# Altium PCB SV06.PcbDoc (part 2 of 3)
Units mil, origin at the board's own origin, x right, y up, seen from the top; angles counter-clockwise.
Board outline 3960.63 x 2763.78 mil, 2 copper layers (Top, Bottom), stack 12.7 mil thick; 211 components, 173 nets, 726 pads, 644 vias.
Unrouted connection lines stored in the file: 411.
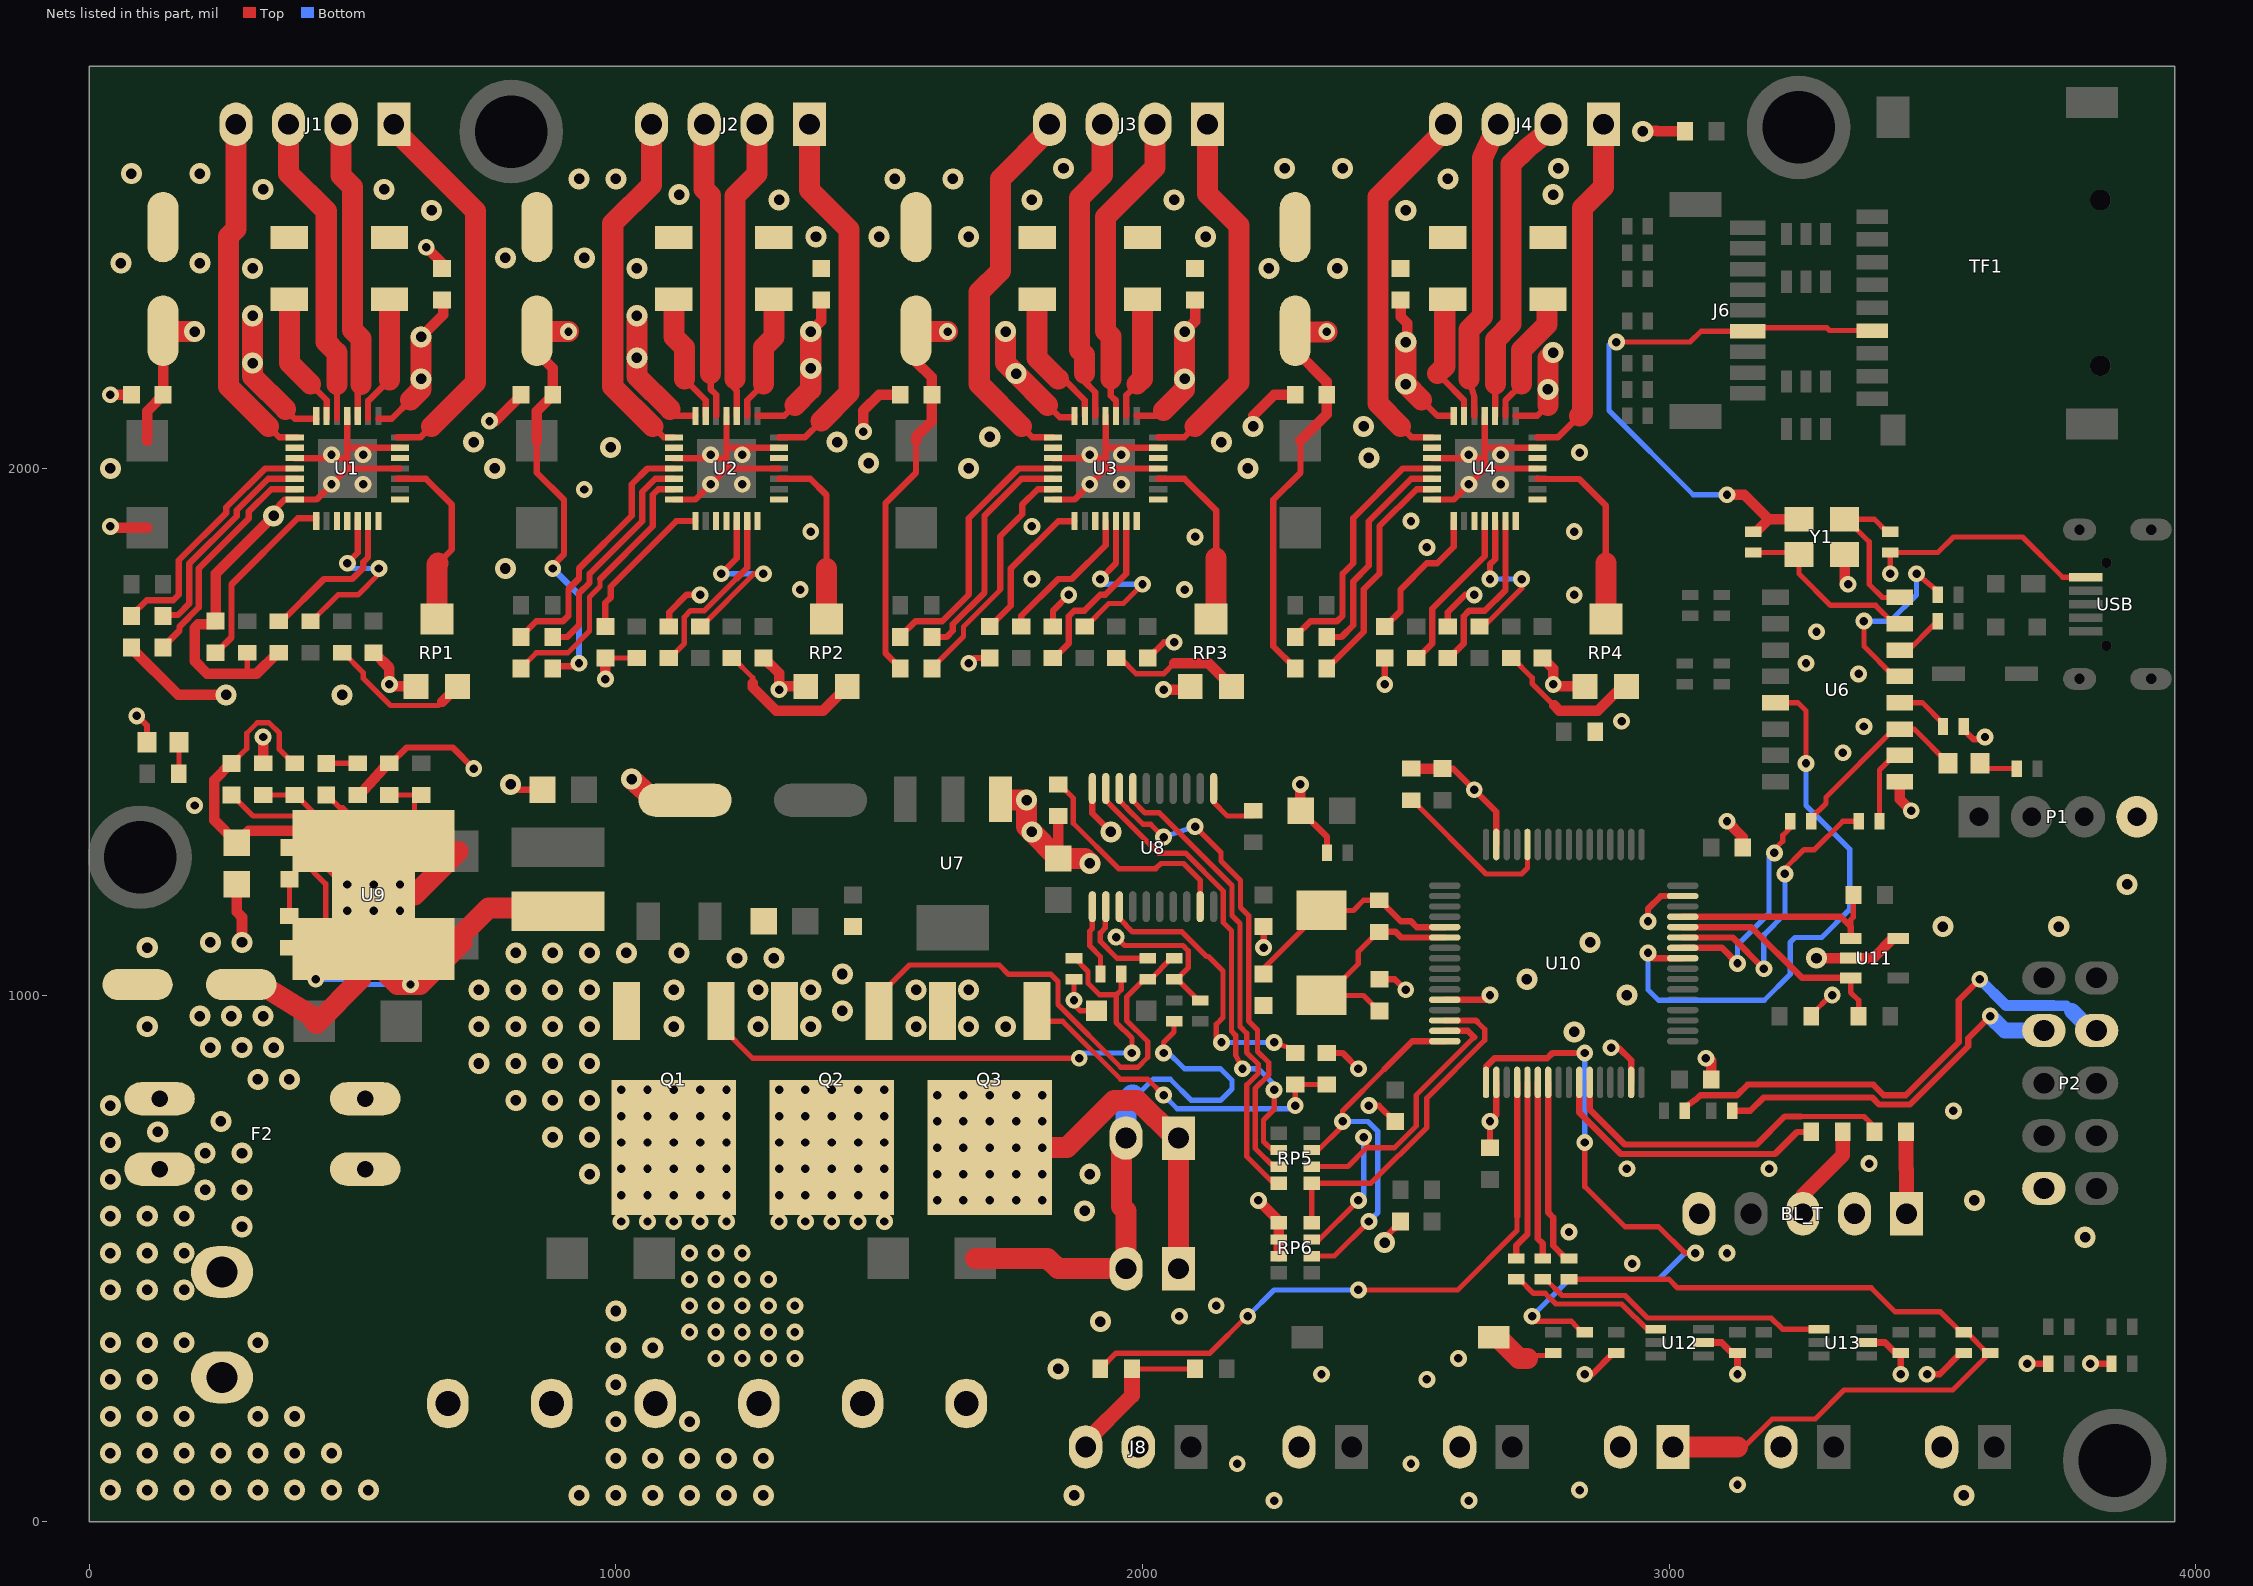
[diagram p2: the nets of this part, all layers, seen from the top]

## Via types
v1: diameter 32, hole 16, Top to Bottom, 363 vias
v2: diameter 40, hole 20, Top to Bottom, 281 vias

## Nets (pads, with @x,y where several pads share a name; then routed paths per layer and width w, separated by ;. In a path a pad name is that pad's centre, name@x,y a point inside that pad or via, vN(x,y) a via of type N, cw(c..) or ccw(c..) an arc to the next point about the centre after c; other vN are vias at no path point) (continued)
24V: C1.2 C2.2 C3.1 C4.1 C5.1 C6.1 C7.1 C8.1 C9.1 C10.1 C11.2 C12.2 C20.1 C23.1 C26.1 C29.1 C42.1 C48.1 R27.2 U1.22 U1.28 U2.22 U2.28 U3.22 U3.28 U4.22 U4.28 U9.2 | length 5495.8
  Top w12: 372.49,2112.49 390.49,2094.49 430.94,2094.49 ; 549.06,2094.49 574.49,2094.49 610,2130 ; 850,2052.68 850,1992.17 901.37,1940.8 901.37,1836.83 877.27,1812.73 v1(880,1810) ; C23.1@880,1620 880,1624.55 930,1624.55 v1(930,1630) ; 1102.49,2112.49 1115.08,2099.9 1150.94,2099.9 ; 1269.06,2099.9 1319.9,2099.9 1340,2120 ; C26.1@1540,1620 1540,1621 1512,1649 1512,1934.17 1570,1992.17 1570,2052.68 ; 1820,2120 1842.63,2097.37 1870.94,2097.37 1870.94,2099.9 ; 1989.06,2099.9 2029.9,2099.9 2040,2110 ; C29.1@2290,1620 2290,1621 2248.63,1662.37 2248.63,1940.8 2300,1992.17 2300,2052.68 ; 2530,2130 2560.1,2099.9 2590.94,2099.9 ; 2709.06,2099.9 2749.9,2099.9 2770,2120
  Top w20: C20.1@80,1660 80,1659 169,1570 v2(260,1570) ; 110,2052.68 110,2109 140,2139 C9.1@140,2140 140,2260 C5.1@140,2261.57 ; C42.1@280,1210.63 280,1157.81 290,1147.81 v2(290,1100) ; R27.2@330,1440 v1(330,1490) ; v2(630,2250) 672,2292 672,2320 C1.2@670,2320 ; 850,2052.68 850,2109 880,2139 C10.1@880,2140 ; C6.1@850,2261.57 850,2220 880,2190 C10.1@880,2140 ; C10.1@882.64,2140 C10.1@880,2140 ; v2(1370,2260) 1390,2280 C2.2@1390,2320 ; 1570,2052.68 1570,2060 1600,2090 C11.2@1600,2140 1600,2173 1570,2203 1570,2260 C7.1@1570,2261.57 ; v2(2080,2260) 2100,2280 C3.1@2100,2320 ; C8.1@2290,2261.57 2290,2260 2290,2259.41 2290,2224.17 2350,2164.17 C12.2@2350,2140 2350,2102.68 2300,2052.68 ; C4.1@2490,2320 2490.73,2320 2490.73,2288 2502.73,2276 2502.73,2240 v2(2500,2240)
  Top w40: C5.1@140,2260 v2(200,2260) ; C48.1@288.43,1020 325.83,1020 427.32,957.43 427.32,950 431.09,950 431.09,946.23 515,1030.14 U9.2@515,1087.64 ; v2(310,2290) v2(310,2200) 310,2174.98 372.49,2112.49 ; 610,2130 630,2150 v2(630,2170) v2(630,2250) ; C6.1@850,2261.57 852.72,2260 v1(910,2260) ; v2(1040,2290) v2(1040,2210) 1040,2174.98 1102.49,2112.49 ; 1340,2120 1370,2150 v2(1370,2190) v2(1370,2260) ; C7.1@1570,2260 v1(1630,2260) ; v2(1740,2260) 1740,2200 v2(1760,2180) 1820,2120 ; 2040,2110 2080,2150 v2(2080,2170) v2(2080,2260) ; C8.1@2290,2259.41 2350,2259.41 v1(2350,2260) ; v2(2500,2240) v2(2500,2160) 2530,2130 ; 2770,2120 v2(2770,2150) 2770,2210 v2(2780,2220)
  Bottom w12: v1(880,1810) 930,1760 v1(930,1630)
  other v2: 320,840 380,840 230,900 290,900 350,900 210,960 270,960 330,960 230,1100
24V_IN: BED.1 F2.3 F2.4 FAN.1 HEAT1.1 J5.2 J7.2 R67.2 | length 1109.1
  Top w10: v1(2040,890) 2040,910 2060,930 R67.2@2060,950.32
  Top w40: 1682.68,500 1819.69,500 1839.37,480.31 J7.2@1968.5,480.31 1968.5,589.88 1960,598.38 1960,728.35 J5.2@1968.5,728.35
  Bottom w10: 1981.82,810 1990,810 2020,840 2052.78,840 2092.78,800 2148.18,800 2170,821.82 2170,838.18 2148.18,860 2080,860 2045,895 v1(2040,890)
  Bottom w40: J5.2@1968.5,728.35 1968.5,798.5 1980,810 1981.82,810
  other v2: 930,50 1000,50 1070,50 1140,50 1210,50 1280,50 1000,120 1070,120 1140,120 1210,120 1280,120 1000,190 1140,190 1000,260 1000,330 1070,330 1000,400
$$$280: D6.2 R26.1 | length 60.3
  Top w10: R26.1@170,1420 170.32,1420 D6.2@170.32,1480
$$$2564: R15.1 U2.12 | length 358
  Top w10: R15.1@1160,1700 1162.5,1700 1262.5,1800 v1(1280,1800)
  Top w12: v1(1200,1800) 1229.68,1829.68 1229.68,1900.1
  Bottom w10: v1(1200,1800) 1205,1805 1210,1800 v1(1280,1800)
$$$2565: R14.1 U2.13 | length 338.8
  Top w10: R14.1@1100,1640 1102.5,1640 1130,1667.5 1130,1718.06 1141.94,1730 1168.18,1730 1228.18,1790
  Top w12: 1228.18,1790 1249.37,1811.19 1249.37,1900.1
$$$2566: R16.1 RP2.3 | length 290.3
  Top w10: R16.1@1220,1640 1222.5,1640 1260,1602.5 1260,1591.82
  Top w20: 1260,1591.82 1260,1584.75 1304.75,1540 1393.34,1540 RP2.3@1439.37,1586.03
$$$2567: RP2.2 U2.17 | length 338.4
  Top w12: 1309.9,1980.31 1369.28,1980.31 1400,1949.6 1400,1810
  Top w40: RP2.2@1400,1713.98 1400,1810
$$$2568: C17.1 U2.4 | length 499.1
  Top w12: C17.1@820,1680 820,1681 849,1710 899.47,1710 910,1720.53 910,1771.12 930,1791.12 930,1810 1030,1910 1030,1970 1060,2000 1110.1,2000
$$$2569: C17.2 U2.5 | length 432.7
  Top w12: C17.2@880,1680 908,1680 930,1702 930,1762.8 950,1782.8 950,1800 1050,1900 1050,1955.46 1074.86,1980.31 1110.1,1980.31
$$$2570: C23.2 U2.6 | length 513.2
  Top w10: C23.2@820,1620 820,1621 849,1650 909,1650 950,1691 950,1755.9 970,1775.9 970,1790
  Top w12: 970,1790 1070,1890 1070,1950 1080.63,1960.63 1110.1,1960.63
$$$2571: S4.2 U2.23 | length 242.4
  Top w12: 1249.37,2099.9 1249.37,2129.37 1280,2160
  Top w40: 1280,2160 1280,2229.55 1300,2249.55 S4.2@1300,2321.34
$$$2572: S3.2 U2.27 | length 246.6
  Top w12: 1130,2170 1170.63,2129.37 1170.63,2099.9
  Top w40: S3.2@1110,2321.34 1110,2250 1130,2230 1130,2170
$$$2573: C24.1 U2.8 | length 296.8
  Top w10: C24.1@980,1700 C24.1@984.62,1700
  Top w12: C24.1@980,1700 980,1744.93 990,1754.93 990,1775.46 1114.64,1900.1 1150.94,1900.1
$$$2574: J2.1 U2.21 | length 709.6
  Top w12: 1309.9,2059.06 1359.06,2059.06 1390,2090
  Top w40: J2.1@1367.72,2653.54 1367.72,2529.13 1443,2453.85 1443,2143 1390,2090
$$$2575: J2.2 U2.24 | length 572.4
  Top w12: 1226,2170 1226,2151.41 1229.68,2147.72 1229.68,2099.9
  Top w40: 1226,2170 1226,2517.77 1267.72,2559.49 J2.2@1267.72,2653.54
$$$2576: J2.3 U2.26 | length 563
  Top w12: 1180,2180 1180,2150 1190.32,2139.68 1190.32,2099.9
  Top w40: J2.3@1167.72,2653.54 1167.72,2530.8 1180,2518.51 1180,2180
$$$2577: J2.4 U2.1 | length 684.4
  Top w12: 1070,2079.93 1090.87,2059.06 1110.1,2059.06
  Top w40: J2.4@1067.72,2653.54 1067.72,2538.51 994,2464.8 994,2155.93 1070,2079.93
$$$5473: HEAT1.2 Q2.2
  other v1: 1310,570 1360,570 1410,570 1460,570 1510,570 1310,620 1360,620 1410,620 1460,620 1510,620 1310,670 1360,670 1410,670 1460,670 1510,670 1310,720 1360,720 1410,720 1460,720 1510,720 1310,770 1360,770 1410,770 1460,770 1510,770 1310,820 1360,820 1410,820 1460,820 1510,820
$$$5502: J5.1 J7.1 Q3.2 | length 674.4
  Top w40: Q3.2@1710,710.4 1856.75,710.4 1946.36,800 1990.55,800 2060.43,730.12 2060.43,728.35 J5.1@2068.5,728.35 J7.1@2068.5,480.31
  other v1: 1610,610 1660,610 1710,610 1760,610 1810,610 1610,660 1660,660 1710,660 1760,660 1810,660 1610,710 1660,710 1710,710 1760,710 1810,710 1610,760 1660,760 1710,760 1760,760 1810,760 1610,810 1660,810 1710,810 1760,810 1810,810
$$$5770: R19.1 U3.12 | length 355.6
  Top w10: R19.1@1890,1700 1892.5,1700 1935.95,1743.45 1963.45,1743.45 v1@1999.06,1779.06 ; v1@1999.06,1779.06 v1(2000,1780) 1999.06,1776.56 v1@1999.06,1779.06
  Top w12: v1(1920,1790) 1949.68,1820.31 1949.68,1900.1
  Bottom w10: v1(1920,1790) 1930,1780 v1(2000,1780)
$$$5771: R18.1 U3.13 | length 336.3
  Top w12: R18.1@1830,1640 1832.5,1640 1860,1667.5 1860,1719.47 1870.53,1730 1889.79,1730 1919.79,1760 1929.6,1760 1969.37,1799.77 1969.37,1900.1
$$$5772: R20.1 RP3.3 | length 262.2
  Top w10: R20.1@1950,1640 1950,1642.78 1955.28,1642.78 1988.06,1610 2040.18,1610 2060.18,1630
  Top w20: 2060.18,1630 2125.39,1630 RP3.3@2169.37,1586.03
$$$5773: RP3.2 U3.17 | length 350.9
  Top w12: 2029.9,1980.31 2079.68,1980.31 2139.85,1920.15 2139.85,1829.85
  Top w40: RP3.2@2130,1713.98 2139.85,1713.98 2139.85,1829.85
$$$5774: C18.1 U3.4 | length 508.1
  Top w12: C18.1@1540,1680 1540,1681 1569,1710 1619.47,1710 1670,1760.53 1670,1905.46 1764.54,2000 1830.1,2000
$$$5775: C18.2 U3.5 | length 447
  Top w12: C18.2@1600,1680 1628,1680 1640,1692 1640,1704.3 1700,1764.3 1700,1910 1770.32,1980.31 1830.1,1980.31
$$$5776: C26.2 U3.6 | length 453.1
  Top w10: C26.2@1600,1620 1600,1621 1660,1681 1660,1699.48 1730,1769.48 1730,1771.1
  Top w12: 1730,1771.1 1730,1870.95 1771.8,1912.75 1771.8,1931.56 1800.87,1960.63 1830.1,1960.63
$$$5777: S6.2 U3.23 | length 234.1
  Top w12: 1969.37,2099.9 1969.37,2139.37 1990,2160
  Top w40: 1990,2160 2000,2170 S6.2@2000,2321.34
$$$5778: S5.2 U3.27 | length 264.8
  Top w12: 1840,2170 1850,2170 1890.63,2129.37 1890.63,2099.9
  Top w40: S5.2@1800,2321.34 1800,2210 1840,2170
$$$5779: C27.1 U3.8 | length 285.5
  Top w12: C27.1@1710,1700 1711,1700 1750,1739 1750,1810 1840,1900 1870.94,1900 1870.94,1900.1
$$$5780: J3.1 U3.21 | length 711.3
  Top w12: 2029.9,2059.06 2079.06,2059.06 2100,2080
  Top w40: 2100,2080 2183,2163 2183,2461.8 2123.62,2521.18 J3.1@2123.62,2653.54
$$$5781: J3.2 U3.24 | length 601.1
  Top w12: 1940,2170 1940,2138 1948,2130 1948.81,2130 1949.68,2129.13 1949.68,2099.9
  Top w40: 1940,2170 1940,2250.97 1930,2260.97 1930,2477.85 2023.62,2571.47 J3.2@2023.62,2653.54
$$$5782: J3.3 U3.26 | length 584.3
  Top w12: 1890,2180 1890,2165.1 1910.32,2144.79 1910.32,2099.9
  Top w40: 1890,2180 1890,2215.49 1880,2225.49 1880,2513.92 1923.62,2557.54 J3.3@1923.62,2653.54
$$$5783: J3.4 U3.1 | length 730.8
  Top w12: 1770,2080 1790.94,2059.06 1830.1,2059.06
  Top w40: 1770,2080 1690,2160 1690,2335 1730,2375 1730,2550.08 1823.62,2643.7 J3.4@1823.62,2653.54
$$$7411: R23.1 U4.12 | length 305.9
  Top w10: R23.1@2640,1700 2640,1697.22 2645.28,1697.22 2720,1771.94 v1(2720,1790)
  Top w12: v1(2660,1790) 2660,1818.08 2669.68,1827.76 2669.68,1900.1
  Bottom w10: v1(2660,1790) v1(2720,1790)
$$$7412: R22.1 U4.13 | length 324.4
  Top w12: R22.1@2580,1640 2582.5,1640 2610,1667.5 2610,1719.47 2620.03,1729.5 2650,1729.5 2689.37,1768.87 2689.37,1900.1
$$$7413: R24.1 RP4.3 | length 292.4
  Top w10: R24.1@2700,1640 2702.5,1640 2740,1602.5 2740,1591.82 2781.82,1550
  Top w20: 2781.82,1550 2791.82,1540 2864.48,1540 2914.94,1590.46 2919.37,1590.46 RP4.3@2919.37,1586.03
$$$7414: RP4.2 U4.17 | length 367
  Top w12: 2749.9,1980.31 2749.9,1980.1 ; 2880,1820 2880,1929.6 2829.6,1980 2750,1980 ; 2749.9,1980.1 2750,1980 ; 2749.9,1980.1 2749.9,1980 2750,1980
  Top w40: RP4.2@2880,1713.98 2880,1820
$$$7415: C19.1 U4.4 | length 490
  Top w12: C19.1@2290,1680 2290,1681 2319,1710 2369.47,1710 2380,1720.53 2380,1800.34 2400,1820.34 2400,1905.77 2494.23,2000 2550.1,2000
$$$7416: C19.2 U4.5 | length 422.9
  Top w12: C19.2@2350,1680 2378,1680 2400,1702 2400,1785.34 2430,1815.34 2430,1900 2510.32,1980.31 2550.1,1980.31
$$$7417: C29.2 U4.6 | length 440.8
  Top w12: C29.2@2350,1620 2420,1690 2420,1770.34 2450,1800.34 2450,1890 2520.63,1960.63 2550.1,1960.63
$$$7418: S8.2 U4.23 | length 256
  Top w12: 2689.37,2099.9 2689.37,2129.37 2720,2160
  Top w40: 2720,2160 2720,2225.05 2768.04,2273.09 2768.04,2321.34 S8.2@2770,2321.34
$$$7419: S7.2 U4.27 | length 255.4
  Top w12: 2560,2180 2560,2178 2568,2170 2570,2170 2610.63,2129.37 2610.63,2099.9
  Top w40: 2560,2180 2574,2194 2574,2321.34 S7.2@2580,2321.34
$$$7420: C30.1 U4.8 | length 266.4
  Top w12: C30.1@2460,1700 2461,1700 2490,1729 2490,1770 2540,1820 2559.6,1820 2590.94,1851.35 2590.94,1900.1
$$$7421: J4.1 U4.21 | length 669.5
  Top w12: 2749.9,2059.06 2789.06,2059.06 2830,2100
  Top w40: 2830,2100 2836,2106 2836,2494.57 2875.59,2534.16 J4.1@2875.59,2653.54
$$$7422: J4.2 U4.24 | length 601
  Top w12: 2669.68,2099.9 2670,2099.9 2670,2160
  Top w40: 2670,2160 2670,2244.24 2700,2274.24 2700,2577.95 2730.01,2607.97 2775.59,2643.7 J4.2@2775.59,2653.54
$$$7423: J4.3 U4.26 | length 575.7
  Top w12: 2620,2170 2630.32,2135.06 2630.32,2099.9
  Top w40: 2620,2170 2620,2263.43 2645.6,2289.03 2645.6,2590 2671.19,2645.72 2671.19,2653.54 J4.3@2675.59,2653.54
$$$7424: J4.4 U4.1 | length 713.4
  Top w12: 2490,2080 2510.94,2059.06 2550.1,2059.06
  Top w40: 2490,2080 2447,2123 2447,2515.11 2575.59,2643.7 J4.4@2575.59,2653.54
$$$7564: J8.3 R58.2 R59.1 | length 304.7
  Top w10: R58.2@1980,290 R59.1@2100,290
  Top w30: J8.3@1892.13,141.73 1892.13,151.57 1980,239.45 R58.2@1980,290
$$$8275: R63.1 S9.2 | length 136.5
  Top w10: 2731.07,310 2736.53,315.47 2780,315.47 R63.1@2780,320.31
  Top w40: S9.2@2667.16,350 2675.03,350 2715.07,309.96 2729.96,309.96 2730,310 2731.07,310
$$$11500: BL_T.1 R48.2 | length 155.7
  Top w28: R48.2@3450,740 3450,670 3450.79,669.21 BL_T.1@3450.79,584.65
$$$11539: BL_T.3 R47.2 | length 186.9
  Top w28: BL_T.3@3253.94,584.65 3253.94,620 3330,696.06 R47.2@3330,740
$$$12002: C43.1 U9.1 | length 228.1
  Top w10: C43.1@380,1280 381.83,1280 404.28,1255.72 448.87,1211.13 448.87,1123.45 465,1107.32 U9.1@465,1087.64
$$$12005: C43.2 R38.1 | length 70
  Top w10: R38.1@380,1150 C43.2@380,1220
$$$12017: J1.1 U1.21 | length 746.2
  Top w12: 584.49,2059.06 629.06,2059.06 650,2080
  Top w40: J1.1@578.35,2653.54 578.35,2643.7 733,2489.05 733,2163 650,2080
$$$12018: L1.1 R38.2 U9.3 | length 733.5
  Top w10: R38.2@380,1090 382.5,1090 410.91,1061.59 410.91,1049.09 v1(430,1030)
  Top w40: U9.3@565,1087.64 565,1040 585,1020 v1(610,1020) 628.19,1020 707.75,1099.57 700,1099.57 700,1107.32 757.75,1165.08 890,1165.08 L1.1@890,1158.98
  Bottom w10: v1(430,1030) 515,1030 525,1020 v1(610,1020)
$$$12023: J1.2 U1.24 | length 577.5
  Top w12: 509.68,2094.49 509.68,2153.06 516.32,2159.68
  Top w40: J1.2@478.35,2653.54 478.35,2556.37 500,2534.72 500,2262.97 516.32,2246.66 516.32,2159.68
$$$12028: J1.3 U1.26 | length 597.1
  Top w12: 470.32,2094.49 470.32,2159.68
  Top w40: J1.3@378.35,2653.54 378.35,2560.48 450,2488.83 450,2240 470.32,2219.68 470.32,2159.68
$$$12035: J1.4 U1.1 | length 675.2
  Top w12: 340,2079.93 360.87,2059.06 395.51,2059.06
  Top w40: J1.4@278.35,2653.54 278.35,2454.8 264,2440.46 264,2155.93 340,2079.93
$$$12073: R30.2 R31.1 U9.5 | length 150.1
  Top w10: R30.2@570,1380 R31.1@617.5,1380 ; U9.5@615,1292.36 617.5,1292.36 R31.1@617.5,1380 ; R31.1@630,1380 R31.1@617.5,1380
$$$12171: R27.1 R28.2 U9.7 | length 231.6
  Top w10: R27.1@330,1380 R28.2@390,1380 392.5,1380 432.5,1340 470,1340 500,1310 515,1310 U9.7@515,1292.36
$$$12210: C32.1 U9.8 | length 242.5
  Top w10: C32.1@270,1380 271,1380 311,1340 406.25,1340 434.81,1311.44 465,1311.44 U9.8@465,1292.36
$$$12278: C33.1 U9.6 | length 162.8
  Top w10: C33.1@450,1380 451,1380 474.89,1356.11 481.17,1356.11 497.29,1340 537.05,1340 565,1312.05 U9.6@565,1292.36
$$$12281: C33.2 R29.2 | length 60
  Top w10: C33.2@450,1440 R29.2@510,1440
$$$15799: R33.1 U10.60 | length 328.5
  Top w10: R33.1@2510,1370 2512.5,1370 2652.5,1230 2720,1230 2731.1,1241.1 U10.60@2731.1,1285.91
$$$17590: R66.1 U3.11 | length 281.5
  Top w12: R66.1@1770,1700 1770,1720 1840,1790 1865.77,1790 1930,1854.23 1930,1900.1
$$$18645: R11.1 U1.12 | length 335.7
  Top w10: R11.1@420,1710 422.5,1710 472.5,1760 510,1760 549.06,1799.06 549.06,1810 v1(550,1810)
  Top w12: v1(490,1820) 489.89,1820.11 509.68,1839.91 509.68,1905.51
  Bottom w10: v1(490,1820) 500,1810 v1(550,1810)
$$$18657: R10.1 U1.13 | length 300.6
  Top w12: R10.1@360,1710 365.62,1710 445.62,1790 499.6,1790 520.06,1810.46 520.06,1822.22 529.37,1831.54 529.37,1905.51
$$$19214: Q2.1 R42.1 R43.2 | length 929.5
  Top w10: Q2.1@1499.48,969.6 1499.48,999.13 1557.35,1057 1728,1057 1745.64,1039.36 1825.99,1039.36 1839.66,1025.69 1839.66,982.15 1958.82,863 1991.18,863 2010,881.82 2010,911.56 1970,951.56 1970,996.23 2004.09,1030.32 R43.2@2010,1030.32 2016.1,1030.32 2053.9,1069.69 R42.1@2060,1069.69
$$$19611: RP5.8 U8.7 | length 908.6
  Top w10: U8.7@1981.61,1392.2 1981.61,1369.57 2005.13,1346.05 2032.13,1346.05 2169.84,1208.35 2169.84,1151.25 2185.26,1135.82 2185.26,940.05 2197.81,927.5 2197.81,890.7 2220,868.51 2220,851.49 2198,829.49 2198,693.61 2252.2,639.41 2258.5,639.41 RP5.8@2258.5,642.76
$$$19787: Q3.1 R45.2 R46.1 | length 689
  Top w10: Q3.1@1799.48,969.6 1799.48,950 1848.69,950 1958.69,840 2010,840 v1(2040,810) ; v1(2290,790) 2285,795 2290,800 R45.2@2290,830 R46.1@2350,830
  Bottom w10: v1(2040,810) 2066,784 2290,784 v1(2290,790)
$$$20193: RP5.7 U8.8 | length 939.9
  Top w10: U8.8@1956.02,1392.2 1956.02,1369.57 1970,1355.59 1970,1355.54 2001.11,1324.43 2015.57,1324.43 v1(2040,1300) ; v1(2100,1320) 2149.05,1270.95 2149.05,1254.44 2186.23,1217.25 2186.23,1166.54 2201.59,1151.18 2201.59,950.85 2218.62,933.82 2218.62,892.85 2240,871.47 2240,848.53 2214,822.53 2214,709.11 2250.73,672.38 2258.5,672.38 RP5.7@2258.5,674.25
  Bottom w10: v1(2040,1300) v1(2100,1320)
$$$20195: RP5.6 U8.9 | length 896.3
  Top w10: U8.9@1930.43,1392.2 1930.43,1369.57 2030.5,1269.5 2081.39,1269.5 2153.44,1197.45 2153.44,1137.71 2169.01,1122.14 2169.01,931.43 2177,923.43 2177,885.18 v1(2190,860) ; v1(2250,820) 2250,782.92 2230,762.92 2230,721.61 2249.23,702.38 2258.5,702.38 RP5.6@2258.5,705.75
  Bottom w10: v1(2190,860) 2220,860 2250,830 v1(2250,820)
$$$20338: R36.2 U8.1 | length 122.5
  Top w10: U8.1@2135.16,1392.2 2134.73,1392.2 2134.73,1366.32 2161.06,1340 2210,1340 R36.2@2210,1350
$$$20351: R32.1 U8.19 | length 431.8
  Top w10: R32.1@1840,1400 1842.5,1400 1868.5,1374 1868.5,1326.28 1954.78,1240 2025,1240 2035,1250 2078.18,1250 2109.57,1218.62 U8.19@2109.57,1167.8
$$$20356: R21.1 U4.11 | length 315.4
  Top w12: R21.1@2520,1640 2522.5,1640 2550,1667.5 2550,1733.61 2650,1833.61 2650,1900.1
$$$23378: R13.1 U12.4 | length 307.7
  Top w10: R13.1@2710,460.31 2715.91,460.31 2742.68,433.54 2764.93,433.54 2784.96,413.51 2910.03,413.51 2960.62,362.91 2974.72,362.91 U12.4@2974.72,365.59
$$$24620: D5.2 R25.1 | length 80
  Top w10: D5.2@3590.32,1440 3590.32,1430 R25.1@3660.31,1430
$$$24621: D5.1 R34.1 U6.3 | length 370.2
  Top w10: R34.1@3269.69,1330 3269.69,1335.91 3297.84,1364.06 3297.84,1375.56 3427.28,1505 U6.3@3438.11,1505 3465.67,1505 3529.69,1440.98 D5.1@3529.69,1440
$$$24623: C14.1 U6.7 Y1.1 | length 357.8
  Top w10: C14.1@3160,1840.31 3246.69,1840.31 Y1.1@3246.69,1836.53 3246.69,1800 3306.69,1740 3392.28,1740 3427.28,1705 U6.7@3438.11,1705
$$$24624: C13.2 U6.8 Y1.3 | length 306.2
  Top w10: Y1.3@3333.31,1903.47 Y1.3@3337.25,1903.47 ; C13.2@3420,1879.68 3414.1,1879.68 3390.32,1903.47 Y1.3@3337.25,1903.47 ; U6.8@3438.11,1755 3405,1755 3380,1780 3380,1860.71 Y1.3@3337.25,1903.47
$$$24628: C15.1 U6.4 | length 104.3
  Top w10: U6.4@3438.11,1555 3481.22,1555 3520.31,1515.9 C15.1@3520.31,1510
$$$24629: R35.1 U6.2 | length 147.3
  Top w10: R35.1@3399.69,1330 3399.69,1427.41 3427.28,1455 U6.2@3438.11,1455
$$$24673: C57.2 J11.1 R54.1 R64.2 | length 1537.5
  Top w10: R64.2@2810,460.32 3000,460.32 3016.36,443.96 3383.87,443.96 3429.49,398.34 3515.44,398.34 3554.1,359.68 C57.2@3560,359.68 ; 3130,141.73 3142.66,141.73 3195.98,195.05 3277.53,195.05 3332.48,250 3538.75,250 R54.1@3609.06,320.31 ; C57.2@3560,363.21 C57.2@3560,359.68 ; R54.1@3610,320.31 R54.1@3609.06,320.31 ; C57.2@3560,359.68 3566.1,359.68 3603.9,320.31 R54.1@3609.06,320.31
  Top w40: J11.1@3007.48,141.73 3130,141.73
$$$24916: F2.1 F2.2 P3.2
  other v2: 40,440 110,440 180,440 40,510 110,510 180,510 290,560 40,580 110,580 180,580 220,630 290,630 40,650 220,700 290,700 40,720 130,740 250,760 40,790
$$$24933: R51.1 U13.4 | length 564
  Top w10: R51.1@2760,460.31 2765.91,460.31 2796.71,429.51 2916.65,429.51 2959.23,386.93 3193.9,386.93 3215.24,365.59 U13.4@3284.72,365.59
$$$26347: R12.1 RP1.3 | length 282
  Top w10: R12.1@480,1650 482.5,1650 520,1612.5 520,1601.82 571.82,1550 663.34,1550 670,1556.66
  Top w20: 670,1556.66 RP1.3@699.37,1586.03
$$$26355: RP1.2 U1.17 | length 352.9
  Top w12: 584.49,1980.31 639.28,1980.31 688,1931.6 688,1845.96 662.04,1820
  Top w40: RP1.2@660,1713.98 660,1817.95 662.04,1820
$$$26401: C16.1 U1.4 | length 476.4
  Top w12: C16.1@80,1720 80,1721 109,1750 159.47,1750 170,1760.53 170,1825.41 260,1915.41 260,1926.17 333.83,2000 395.51,2000
$$$26406: C16.2 U1.5 | length 415.3
  Top w12: C16.2@140,1720 140,1721.57 168,1721.57 190,1743.57 190,1819.46 280,1909.46 280,1920.71 339.6,1980.31 395.51,1980.31
$$$26553: C20.2 U1.6 | length 435.8
  Top w12: C20.2@140,1660 140,1661 171.24,1692.24 171.24,1699.36 208,1736.11 208,1810 303,1905 303,1918.25 345.38,1960.63 395.51,1960.63
$$$26660: S2.2 U1.23 | length 244.6
  Top w12: 529.37,2094.49 529.37,2129.13 531.01,2129.13 570,2168.12
  Top w40: 570,2168.12 S2.2@570,2321.34
$$$26663: S1.2 U1.27 | length 256.1
  Top w12: 420,2160 450.63,2129.37 450.63,2094.49
  Top w40: S1.2@380,2321.34 380,2200 420,2160
$$$26686: C21.1 U1.8 | length 355.7
  Top w12: C21.1@240,1650 241,1650 270,1679 270,1779.6 395.91,1905.51 430.94,1905.51
$$$32108: P2.3 R17.2 | length 698
  Top w12: R17.2@3119.68,780 3154.09,780 3179.59,805.5 3385.67,805.5 3399.17,792 3457.05,792 3568,902.95 3568,918 v1(3610,960)
  Bottom w30: v1(3610,960) 3637.32,932.68 P2.3@3711.81,932.68
$$$32145: P2.4 R65.1 | length 991.8
  Top w12: R65.1@3029.69,780 3029.69,787.09 3052.72,803.03 3059.69,810 3129.1,810 3149.1,830 3387.61,830 3407.61,810 3449.6,810 3550,910.4 3550,990 v1(3590,1030)
  Bottom w20: v1(3590,1030) 3639.83,980.17 3730,980.17 3730,980 3754.65,980 3764.65,970
  Bottom w30: 3764.65,970 3801.97,932.68 P2.4@3811.81,932.68
$$$32443: BED.2 Q1.2
  other v1: 1190,310 1240,310 1290,310 1340,310 1140,360 1190,360 1240,360 1290,360 1340,360 1140,410 1190,410 1240,410 1290,410 1340,410 1140,460 1190,460 1240,460 1290,460 1140,510 1190,510 1240,510 1010,570 1060,570 1110,570 1160,570 1210,570 1010,620 1060,620 1110,620 1160,620 1210,620 1010,670 1060,670 1110,670 1160,670 1210,670 1010,720 1060,720 1110,720 1160,720 1210,720 1010,770 1060,770 1110,770 1160,770 1210,770 1010,820 1060,820 1110,820 1160,820 1210,820
$$$32478: Q1.1 R40.1 R41.2 | length 1163.3
  Top w10: Q1.1@1199.48,999.48 Q1.1@1199.48,969.6 1199.48,940.07 1259.55,880 v1(1880,880) ; R40.1@1870,1069.69 1870.31,1070 1871.47,1070 1896.75,1044.72 1896.75,1022.42 1918.48,1000.68 1949.63,1000.68 1950,1000.32 ; R41.2@1959.68,1040 1959.68,1010 1950,1000.32 ; v1(1980,890) 1980,918.18 1950,948.18 1950,1000.32
  Bottom w10: v1(1880,880) 1880,890 v1(1980,890)
BED_5V: R41.1 U8.11 | length 138.2
  Top w10: U8.11@1904.84,1167.8 1904.84,1126.41 1900,1121.57 1900,1093.12 1920.31,1072.81 R41.1@1920.31,1040
D+: R71.2 U6.5 | length 359.3
  Top w10: v1(3370,1710) 3370,1662.28 3427.28,1605 U6.5@3438.11,1605 ; v1(3470,1800) 3510.32,1766.76 R71.2@3510.32,1760
  Bottom w10: v1(3370,1710) 3420,1710 3470,1760 v1(3470,1800)
D-: R72.2 U6.6 | length 101
  Top w10: U6.6@3438.11,1655 3438.11,1651.93 3452.01,1651.93 3507.25,1707.17 3507.25,1710 R72.2@3510.32,1710
GND: BL_T.2 BL_T.5 C1.1 C2.1 C3.2 C4.2 C5.2 C6.2 C7.2 C8.2 C9.2 C10.2 C11.1 C12.1 C13.1 C14.2 C15.2 C21.2 C22.2 C24.2 C25.2 C27.2 C28.2 C30.2 C31.2 C32.2 C34.2 C36.1 C38.2 C39.1 C40.1 C41.1 C42.2 C44.2 C46.2 C47.2 C48.2 C49.2 C50.2 C51.1 C52.1 C53.1 C54.1 C55.1 C56.1 C57.1 C58.2 C59.2 C60.2 D6.1 D14.2 FAN.2 J6.6 J8.2 J9.2 J10.2 J11.2 P1.4 P2.9 P3.1 Q1.3 Q2.3 Q3.3 R9.1 R10.2 R14.2 R18.2 R22.2 R28.1 R29.1 R30.1 R32.2 R33.2 R40.2 R42.2 R46.2 R53.2 R55.2 R60.2 R61.2 R68.1 R70.2 RP1.1 RP2.1 RP3.1 RP4.1 RP6.1 RP6.2 RP6.3 S1.1 S2.1 S3.1 S4.1 S5.1 S6.1 S7.1 S8.1 TB.2 TF1.6 TH.2 U1.3 U1.7 U1.18 U1.20 U1.25 U2.3 U2.7 U2.18 U2.20 U2.25 U3.3 U3.7 U3.18 U3.20 U3.25 U4.3 U4.7 U4.18 U4.20 U4.25 U6.1 U7.1 U8.10 U9.0 U9.4 U10.12 U10.18 U10.31 U10.47 U10.63 U11.2 U11.5 U12.2 U13.2 USB.1 Y1.2 Y1.4 | length 10524.1
  Top w10: C32.2@270,1440 271,1440 298.89,1467.89 298.89,1497.07 318.82,1517 341.18,1517 360.86,1497.32 360.86,1466.64 387.5,1440 R28.1@390,1440 ; 300,1610 R53.2@300,1650 ; C24.2@980,1640 R55.2@1040,1640 ; R40.2@1870,1030.32 v1(1870,990) 1870,982.07 1882.07,970 1910,970 D14.2@1912.76,970 ; v1(1950,1110) 1965.89,1094.11 2076.73,1094.11 2086.75,1084.09 2086.75,1051.16 R42.2@2065.91,1030.32 ; R42.2@2060,1030.32 R42.2@2065.91,1030.32 ; R68.1@2110,989.69 2106.54,989.69 R42.2@2065.91,1030.32 ; v1(2900,2240) 3040,2240 3060.63,2260.63 3158.07,2260.63 J6.6@3149.51,2260.64 3138.9,2261.81 3143.62,2266.53 3144.09,2267 3299.79,2267 3304.98,2261.81 TF1.6@3385.83,2261.81 ; v2@2949.95,2641.2 2950,2641.15 v2(2950,2640) ; R61.2@3270,960 3270,962.5 3307.5,1000 v1(3310,1000) ; v1(3420,1800) v1@3420,1809.73 ; v1@3420,1809.74 C13.1@3420,1840.31 3510.31,1840.31 3540,1870 3671.02,1870 3747.72,1793.31 USB.1@3791.34,1793.31
  Top w12: v1(90,1530) 90.98,1530 109.69,1511.29 D6.1@109.69,1480 ; v2(350,1910) 350,1920 371.03,1941.03 395.51,1941.03 395.51,1940.94 ; 390.1,1940.94 395.51,1940.94 ; 390.1,2019.68 490,2019.68 ; v1@460,1974 v1@461.6,1972.4 ; U1.18@490,2099.9 490,2039.37 ; R30.1@570,1440 572.5,1440 602.5,1470 690,1470 v1(730,1430) ; 589.9,2000 490,2000 ; 589.9,2039.37 490,2039.37 ; v2(800,1400) 810,1390 C46.2@860.63,1390 ; R14.2@1100,1700 1101.04,1700 1101.04,1727 1134.04,1760 v1(1160,1760) ; 1110.1,1940.94 1150.94,1940.94 v1(1180,1970) 1210,2000 ; 1110.1,2019.68 1210,2019.68 ; U2.18@1210,2099.9 1210,2039.37 ; 1309.9,2000 1210,2000 ; 1309.9,2039.37 1210,2039.37 ; v1(1670,1630) 1680,1640 C27.2@1710,1640 ; R18.2@1830,1700 1830,1730 v1(1860,1760) ; 1830.1,1940.94 1870.94,1940.94 v1(1900,1970) 1930,2000 ; 1830.1,2019.68 1930,2019.68 ; U8.10@1904.84,1392.2 1904.84,1345.16 v2(1940,1310) ; U3.18@1930,2099.9 1930,2039.37 ; C28.2@2010,1640 2011,1640 2041,1670 v1(2060,1670) ; 2029.9,2000 1930,2000 ; 2029.9,2039.37 1930,2039.37 ; v1(2230,1090) C47.2@2230,1130 ; C40.1@2300.63,1350 2350.32,1300.31 C34.2@2350.32,1270 ; R46.2@2350,890 2380,890 v1(2410,860) ; v1(2430,790) 2449,790 2479,760 C52.1@2480,760 ; C50.2@2450,1030 2479,1030 2500,1009 v1(2500,1010) ; v2(2460,530) 2460,539 2490,569 C54.1@2490,570 ; v1(2460,1590) C30.2@2460,1640 ; 2550.1,1940.94 2590.94,1940.94 v1(2620,1970) 2650,2000 ; 2550.1,2019.68 2650,2019.68 ; C36.1@2570,1430 2590,1430 v1(2630,1390) 2672.05,1347.95 U10.63@2672.05,1285.91 ; U10.12@2574.09,991.1 2651.1,991.1 v1(2660,1000) ; R22.2@2580,1700 2580,1727 2613,1760 v1(2630,1760) ; U4.18@2650,2099.9 2650,2039.37 ; C53.1@2660,710 v1(2660,760) 2672.05,772.05 U10.18@2672.05,834.09 ; 2749.9,2000 2650,2000 ; 2749.9,2039.37 2650,2039.37 ; v1(2840,280) 2853.78,280 2894.09,320.31 R9.1@2900,320.31 ; v1(2890,900) 2904.05,900 2927.95,876.09 U10.31@2927.95,834.09 ; v1(2960,1140) 2960,1164.05 2983.91,1187.95 U10.47@3025.91,1187.95 ; v1(3440,280) C56.1@3440,320.31 ; v1(3490,280) 3513.78,280 3554.1,320.31 C57.1@3560,320.31 ; C15.2@3559.68,1510 3559.68,1504.09 3578.01,1485.76 3595.76,1485.76 v1(3600,1490) ; v1(3680,300) C58.2@3720.32,300 ; v1(3800,300) C59.2@3840.32,300 ; 395.51,1940.94 431.45,1940.94 490.15,1999.64 490,2000 ; 490,2000 490,2019.68 ; 490,2019.68 490,2039.37 ; 1210,2000 1210,2019.68 ; 1210,2019.68 1210,2039.37 ; 1930,2000 1930,2019.68 ; 1930,2019.68 1930,2039.37 ; 2650,2000 2650,2019.68 ; 2650,2019.68 2650,2039.37
  Top w13: U12.2@3065.27,340 3100,340 3119.69,320.31 3120.31,320.31 C55.1@3130,320.31 3130,290 v1(3130,280) ; U13.2@3375.27,340 3410,340 3429.69,320.31 C56.1@3440,320.31
  Top w20: v1(40,1890) 42.68,1887.32 110,1887.32 ; v1(40,2140) C9.2@80,2140 ; C32.2@270,1440 269,1440 237,1408 237,1332.37 C42.2@280,1289.37 302.63,1312 403.63,1312 425.09,1290.53 425.09,1273.25 489.17,1209.17 508.35,1190 U9.0@540,1190 580,1150 615,1115 U9.4@615,1087.64 ; v2(350,1910) 240,1800 C21.2@240,1710 240,1704 207,1704 200,1697 200,1634.37 224.37,1610 300,1610 317.5,1610 357.5,1650 R10.2@360,1650 ; R29.1@510,1380 513,1380 567,1440 R30.1@570,1440 ; C22.2@540,1650 541,1650 570,1621 v1(570,1590) 572.2,1590 576.17,1586.03 RP1.1@620.63,1586.03 ; v1(640,2420) 670,2390 C1.1@670,2380 ; v1(760,2090) 771,2090 820,2139 C10.2@820,2140 ; v1(980,1600) C24.2@980,1640 ; C25.2@1280,1640 1281,1640 1310,1611 v1@1310,1582.2 ; v1(1310,1580) v1@1310,1582.2 ; RP2.1@1360.63,1586.03 1313.83,1586.03 v1@1310,1582.2 ; v1(1470,2070) 1470,2110 1500,2140 C11.1@1540,2140 ; U7.1@1730.55,1372 1778,1372 v2(1780,1370) ; C44.2@1840,1259.37 R32.2@1840,1340 ; v1(2040,1580) 2090.63,1580 RP3.1@2090.63,1586.03 ; v2(2210,2080) 2210,2100 2250,2140 C12.1@2290,2140 ; v1(2220,610) 2258.51,571.49 RP6.1@2258.51,567.24 RP6.2@2258.5,535.75 RP6.3@2258.5,504.25 ; v1(2300,1400) 2300,1350 C40.1@2300.63,1350 ; R33.2@2510,1430 C36.1@2570,1430 ; C31.2@2760,1640 2780,1620 v1@2780,1590.27 ; v1(2780,1590) v1@2780,1590.27 ; RP4.1@2840.63,1586.03 2786.17,1586.03 2780.96,1591.24 v1@2780,1590.27 ; v2@2949.95,2641.2 2976.37,2641.2 2977.57,2640 R70.2@3030,2640 ; v1(3070,880) 3075,880 3080,875 C51.1@3080,840 ; v1(3110,1330) 3140,1300 C41.1@3140,1280 ; v1(3110,1950) 3143.16,1950 3189.69,1903.47 ; C14.2@3160,1879.68 3165.91,1879.68 3189.69,1903.47 ; Y1.4@3246.69,1903.47 3189.69,1903.47 ; v2(3280,1070) U11.2@3344.82,1070 3387.68,1070 3425.08,1107.4 U11.5@3435.18,1107.4 ; Y1.2@3333.31,1836.53 3333.31,1786.69 v1(3340,1780) ; U6.1@3438.11,1405 3438.11,1371.89 v1(3460,1350)
  Top w40: U9.0@540,1190 617.32,1190 700,1272.68 ; v2(1030,1410) 1074.28,1370 C60.2@1131.37,1370 ; U7.1@1730.55,1372 1730.55,1370 v2(1780,1370) 1780,1320 v2(1790,1310) 1835,1264.37 1835,1259.37 C44.2@1840,1259.37 1891,1259.37 1900,1250.37 v2(1900,1250)
  Bottom w10: v1(2900,2240) 2891.1,2240 2886,2234.9 2886,2110 3046,1950 v1(3110,1950)
  other v1: 2250,40 2620,40 2830,60 3130,70 2180,110 2510,110 2540,270 2340,280 2600,310 2070,390 2140,410 2930,490 3110,510 2810,550 2920,670 3190,670 3380,680 3540,780 490,1160 540,1160 590,1160 490,1210 540,1210 590,1210 200,1360 3330,1460 3370,1510 2910,1520 3360,1610 3260,1630 3280,1690 2820,1760 1350,1770 2080,1770 1790,1790 2540,1850 2100,1870 1370,1880 2820,1880 1790,1890 2510,1900 940,1960 460,1970 520,1970 1240,1970 1960,1970 2680,1970 460,2026 520,2026 1180,2026 1240,2026 1900,2026 1960,2026 2620,2026 2680,2026 2830,2030
  other v2: 1870,50 3560,50 40,60 110,60 180,60 250,60 320,60 390,60 460,60 530,60 40,130 110,130 180,130 250,130 320,130 390,130 460,130 40,200 110,200 180,200 320,200 390,200 40,270 110,270 1840,290 40,340 110,340 180,340 320,340 1920,380 3790,540 1890,590 3580,610 950,660 1900,660 880,730 950,730 810,800 880,800 950,800 740,870 810,870 880,870 950,870 2820,930 110,940 740,940 810,940 880,940 950,940 1110,940 1270,940 1370,940 1570,940 1670,940 1740,940 1430,970 2920,1000 740,1010 810,1010 880,1010 950,1010 1110,1010 1270,1010 1370,1010 1570,1010 1670,1010 2730,1030 1430,1040 1230,1070 1300,1070 810,1080 880,1080 950,1080 1020,1080 1120,1080 110,1090 2850,1100 3520,1130 3740,1130 3870,1210 480,1570 790,1810 40,2000 770,2000 1670,2000 2200,2000 1480,2010 2430,2020 990,2040 730,2050 1420,2050 2150,2050 1710,2060 2420,2080 310,2380 1040,2380 2240,2380 2370,2380 60,2390 210,2390 790,2400 940,2400 1380,2440 1500,2440 1670,2440 2120,2440 650,2490 2500,2490 1310,2510 1790,2510 2060,2510 1120,2520 2780,2520 330,2530 560,2530 930,2550 1000,2550 1530,2550 1640,2550 2580,2550 80,2560 210,2560 1850,2570 2270,2570 2380,2570 2790,2570
HEATER1_5V: R43.1 U8.12 | length 174.4
  Top w10: U8.12@1930.43,1167.8 1929.08,1167.8 1929.08,1127.17 1920,1118.09 1920,1101.82 1952.13,1069.69 R43.1@2010,1069.69
K_FAN_5V: R45.1 U8.13 | length 563.1
  Top w10: U8.13@1956.02,1167.8 1956.02,1145.16 1981.18,1120 2074.81,1120 2121.81,1073 2125.18,1073 2152.75,1045.44 2152.75,957.14 2140,944.39 2140,910 v1(2150,910) ; v1(2250,910) 2277.5,900 2290,900 R45.1@2290,890
  Bottom w10: v1(2150,910) v1(2250,910)
OSC_IN: C49.1 R39.2 U10.5 Y2.2 | length 444
  Top w10: C49.1@2230,1040 2230,1050.71 Y2.2@2340,1160.71 ; R39.2@2450,1180 2420,1180 2400.71,1160.71 Y2.2@2340.62,1160.71 ; Y2.2@2340,1160.71 2340,1160 2340.35,1160.4 Y2.2@2340.62,1160.71 ; Y2.2@2340,1160.71 2344.69,1165.4 Y2.2@2340.62,1160.71 ; Y2.2@2340,1160.71 Y2.2@2340.62,1160.71
  Top w12: R39.2@2450,1180 2450.4,1180 2490.4,1140 2510,1140 2521.1,1128.9 U10.5@2574.09,1128.9
OSC_OUT: C50.1 R39.1 U10.6 Y2.1 | length 414.4
  Top w10: Y2.1@2340,999.29 Y2.1@2349.84,999.29 ; C50.1@2450,970 2449,970 2419.71,999.29 Y2.1@2349.84,999.29 ; R39.1@2450,1120 2447.5,1120 2410,1082.5 2410,1059.45 Y2.1@2349.84,999.29
  Top w12: R39.1@2450,1120 2480.4,1120 2491.19,1109.21 U10.6@2574.09,1109.21
PA0_K_FAN1: RP5.1 RP6.8 U10.14 | length 652.5
  Top w10: 2321.49,605 RP5.1@2321.49,642.76 2433.94,642.76 2540,748.82 2540,804.29 2650,914.29 2650,934.87 2634.87,950 ; RP6.8@2321.5,567.24 2321.5,604.99
  Top w12: U10.14@2574.09,951.73 2633.14,951.73 2634.87,950
PA1_HEATER1: RP5.2 RP6.7 U10.15 | length 776
  Top w10: RP6.7@2321.5,535.75 2321.5,532.38 2332.38,532.38 v1(2410,610) ; RP5.2@2321.5,674.25 2390,674.25 2425.75,710 ; v1(2420,730) 2425.75,724.25 2425.75,710 ; 2630,920 2520,810 2520,751.44 2478.56,710 2425.75,710
  Top w12: U10.15@2574.09,932.05 2617.95,932.05 2630,920
  Bottom w10: v1(2410,610) 2420,620 v1(2420,730)
PA2_BED: RP5.3 RP6.6 U10.16 | length 748.3
  Top w10: RP6.6@2321.5,504.25 2364.25,504.25 v1(2430,570) ; RP5.3@2321.5,705.75 2321.5,702.38 2330.77,702.38 2380,751.61 v1(2380,760) 2380,780 2460,860
  Top w12: 2460,860 2512.36,912.36 U10.16@2574.09,912.36
  Bottom w10: v1(2380,760) 2428.18,760 2447,741.18 2447,587 v1(2430,570)
PA3_NONE_LMT: R62.2 U10.17 | length 1222.3
  Top w10: v1(2740,390) 2740.52,380.52 2814.77,380.52 2833.63,359.68 R62.2@2840,359.68 ; v1(2840,720) 2840,636.16 2916.16,560 2980,560 3030,510 v1(3050,510)
  Top w12: U10.17@2652.36,834.09 2652.36,863.87 2668.5,880 2768.63,880 2778.63,890 v1(2840,890)
  Bottom w10: v1(2740,390) 2810,460 2980,460 3030,510 v1(3050,510) ; v1(2840,720) v1(2840,890)
PA4_PLA_DET: R58.1 U10.20 | length 1182.4
  Top w10: R58.1@1920,290 1950,320 2128.18,320 2199.09,390.91 v1(2200,390) ; v1(2410,440) 2598.79,440 2711.42,552.63 2711.42,580
  Top w12: 2711.42,580 U10.20@2711.42,834.09
  Bottom w10: v1(2200,390) 2250,440 v1(2410,440)
PA5_LIMIT_X: R13.2 U10.21 | length 343.2
  Top w12: R13.2@2710,499.68 2710,524.35 2731.1,545.45 U10.21@2731.1,834.09
PA6_LIMIT_Y: R51.2 U10.22 | length 338.2
  Top w12: U10.22@2750.79,834.09 2750.79,537.45 2760,528.23 R51.2@2760,499.68
PA7_LIMIT_Z: R64.1 U10.23 | length 354.2
  Top w12: U10.23@2770.47,834.09 2770.47,586.98 2780,577.45 2780,523.78 2804.09,499.69 R64.1@2810,499.69
PA8_DTR: U6.13 U10.41 | length 1114.9
  Top w10: U6.13@3201.89,1555 3245,1555 3260,1540 v1(3260,1440)
  Top w12: v1(2960,1080) 2970.16,1069.84 U10.41@3025.91,1069.84
  Bottom w10: v1(2960,1080) 2960,1010 2980,990 3180.81,990 3230,1039.19 3230,1100 3239.19,1109.19 3290,1109.19 3343,1162.19 3343,1277 3260,1360 v1(3260,1440)
PA9_MCU_USART_TX_3V3: R34.2 U10.42 | length 435
  Top w10: v1(3200,1270) 3196.8,1273.2 3215.9,1292.29 3215.9,1303.28 3233.52,1320.9 3233.52,1330 R34.2@3230.32,1330
  Top w12: U10.42@3025.91,1089.53 3100.47,1089.53 v1(3130,1060)
  Bottom w10: v1(3130,1060) 3130,1094.8 3190,1154.8 3190,1260 v1(3200,1270)
PA10_MCU_USART_RX_3V3: R35.2 U10.43 | length 566.9
  Top w10: v1(3220,1230) 3215,1235 3256.17,1276.17 3276.17,1276.17 3330,1330 R35.2@3360.32,1330
  Top w12: U10.43@3025.91,1109.21 3120.79,1109.21 v1(3180,1050)
  Bottom w10: v1(3180,1050) 3180,1114.32 3220,1154.32 v1(3220,1230)
PA11_I2C_SDA: R44.2 U10.44 U11.3 | length 437.7
  Top w10: U11.3@3344.82,1032.6 3344.82,1005.18 3360,990 R44.2@3360,960
  Top w12: U10.44@3025.91,1128.9 3156.1,1128.9 3252.4,1032.6 U11.3@3344.82,1032.6
PA12_I2C_SCL: R37.2 U10.45 U11.1 | length 411.4
  Top w10: 3344.82,1129.88 3344.82,1142.6 3350,1147.78 R37.2@3350,1190
  Top w12: U10.45@3025.91,1148.58 3326.12,1148.58 3344.82,1129.88 U11.1@3344.82,1107.4
PB0_BL_TOUCH_IN: R47.1 U10.26 | length 547.5
  Top w12: U10.26@2829.53,834.09 2829.53,776.92 2908.19,698.25 3201.25,698.25 3243,740 R47.1@3270,740
PB1_BL_TOUCH_OUT: R48.1 U10.27 | length 659.8
  Top w10: 3250,769.5 3370.5,769.5 3382.48,757.52 3390,749.72 R48.1@3390,740
  Top w12: U10.27@2849.21,834.09 2849.21,782.69 2915.65,716.25 3166.78,716.25 3220.03,769.5 3250,769.5